# EAGLE board GabozePocaioPlus (EAGLE 9.0.0)
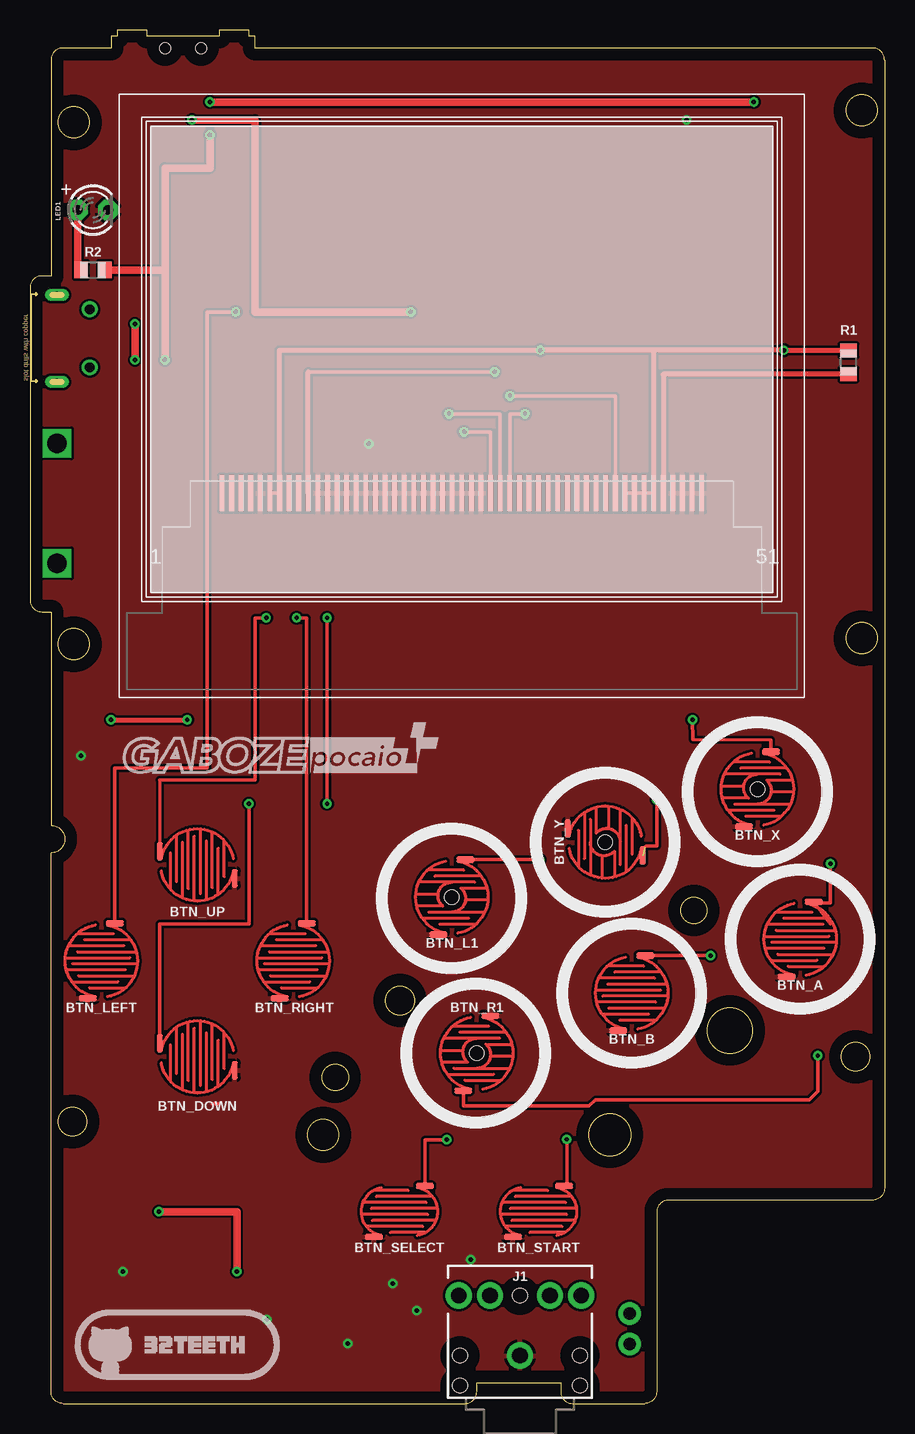
[diagram p0: board, top side]
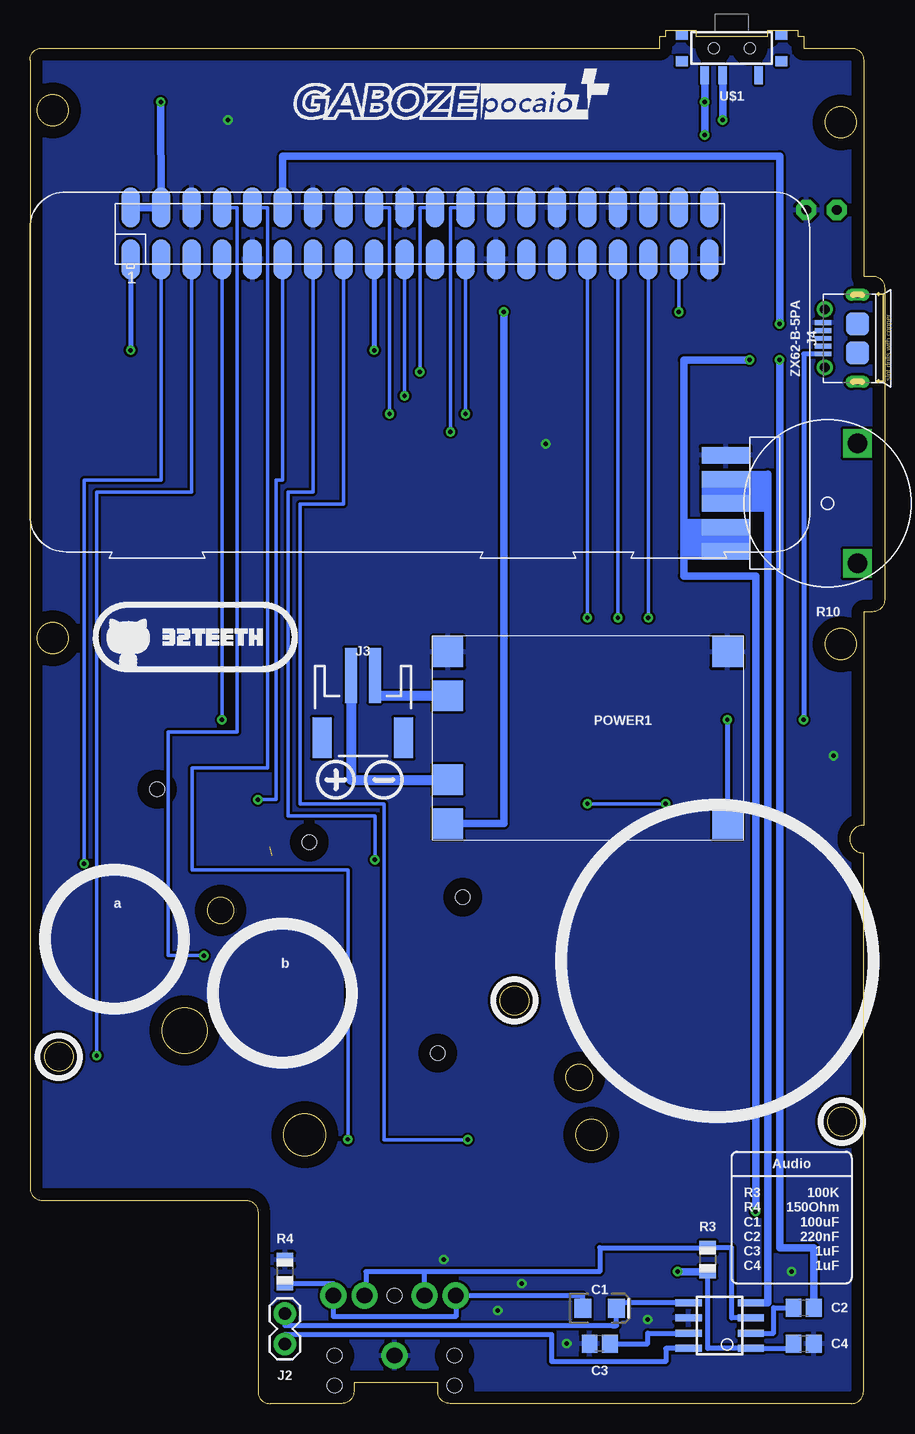
[diagram p1: board, bottom side, seen from below]

Size 71.25 x 114.5 mm. Coordinates in mm from the lower left corner, seen from the top.
Outline: 71.25,112 71.25,17.95 arc-90 70.25,16.95 53.25,16.95 arc90 52.25,15.95 52.25,1 arc-90 51.25,0 45.25,0 arc-90 44.25,1 44.25,1.75 37.25,1.75 37.25,1 arc-90 36.25,0 2.75,0 arc-90 1.75,1 1.75,45.9 arc180 1.75,48.2 1.75,66 1,66 arc-90 0,67 0,93 arc-90 1,94 1.75,94 1.75,112 arc-90 2.75,113 6.75,113 6.75,114 7.25,114 7.25,114.5 9.75,114.5 9.75,114 15.75,114 15.75,114.5 18.25,114.5 18.25,114 18.75,114 18.75,113 70.25,113 arc-90 71.25,112
Outline: circle at 3.55,23.5 radius 1.2
Outline: circle at 68.85,28.9 radius 1.2
Outline: circle at 58.35,31.1 radius 1.9
Outline: circle at 48.35,22.4 radius 1.75
Outline: circle at 30.85,33.6 radius 1.2
Outline: circle at 25.45,27.2 radius 1.1
Outline: circle at 24.45,22.4 radius 1.3
Outline: circle at 55.35,41.1 radius 1.1
Outline: circle at 69.35,107.8 radius 1.3
Outline: circle at 3.65,106.8 radius 1.3
Outline: circle at 69.35,63.8 radius 1.3
Outline: circle at 3.65,63.3 radius 1.3
Copper layers (1*16): Top 0.035mm / dielectric 1.5mm / Bottom 0.035mm
Design rules "default *": minimum track width 10mil, minimum drill 24mil, track to track 8mil, track to pad 8mil, pad to pad 8mil, via to via 8mil, smd to smd 8mil, copper to edge 40mil, drill to drill 8mil, minimum pad ring 10mil, minimum via ring 8mil, stop-mask expansion 5mil, vias tented up to drill 10mil, thermal gap 10mil

## Footprints (pad centres in the part's own frame; a part is rotated, then mirrored left to right if it is on the bottom)
CONDUCTIVE_BUTTON = smd 1.5 x 0.508: P$ACTIVE 1.125,3.125; P$GND -1.125,-3.125
CONDUCTIVE_BUTTON_DRILL = smd 1.5 x 0.508: P$ACTIVE 1.125,3.125; P$GND -1.125,-3.125 | hole 1.2: 0,0
CONDUCTIVE_BUTTON_STARTSELECT = smd 1.5 x 0.508: P$ACTIVE 2.125,2.125; P$GND -2.125,-2.125
EIA3216 = smd 1.4 x 1.6: + 1.4,0; - -1.4,0
C0805 = smd 1.3 x 1.5: 1 -0.85,0; 2 0.85,0
AUDIO-JACK-KIT = drill 1.3 pad 2.184: RING 5,5.1; RSH 5,2.5; SLEEVE 0,0; TIP 5,-5.1; TSH 5,-2.5 | hole 1.2: 0,5; -2.5,5; -2.5,-5; 0,-5; 5,0
1X02 = drill 1.016 pad 1.88: 1 0,0; 2 2.54,0
JST-2-SMD = smd 1 x 4.6: 1 -1,-3.7; 2 1,-3.7 | smd 1.6 x 3.4: NC1 -3.4,1.5; NC2 3.4,1.5
MICRO-USB5+6P-SMD-0.65-AB = smd 0.4 x 1.35: 1 -1.3,2.875; 2 -0.65,2.875; 3 0,2.875; 4 0.65,2.875; 5 1.3,2.875 | smd 1.9 x 1.9: P1 -1.2,0; P2 1.2,0 | drill 0.508 pad 1.016 long: P3 -3.625,0; P4 3.625,0 | drill 0.8: P5 -2.425,2.73; P6 2.425,2.73
LED3MM = drill 0.813 pad 1.676 octagon: A -1.27,0; K 1.27,0
RPI-ZERO = smd 1.524 x 3.302: 1 8.382,24.384; 2 8.382,28.702; 3 10.922,24.384; 4 10.922,28.702; 5 13.462,24.384; 6 13.462,28.702; 7 16.002,24.384; 8 16.002,28.702; 9 18.542,24.384; 10 18.542,28.702; 11 21.082,24.384; 12 21.082,28.702; 13 23.622,24.384; 14 23.622,28.702; 15 26.162,24.384; 16 26.162,28.702; 17 28.702,24.384; 18 28.702,28.702; 19 31.242,24.384; 20 31.242,28.702; 21 33.782,24.384; 22 33.782,28.702; 23 36.322,24.384; 24 36.322,28.702; 25 38.862,24.384; 26 38.862,28.702; 27 41.402,24.384; 28 41.402,28.702; 29 43.942,24.384; 30 43.942,28.702; 31 46.482,24.384; 32 46.482,28.702; 33 49.022,24.384; 34 49.022,28.702; 35 51.562,24.384; 36 51.562,28.702; 37 54.102,24.384; 38 54.102,28.702; 39 56.642,24.384; 40 56.642,28.702
03962A = smd 2.54 x 2.54: B+ 12,1.35; B- 5,1.35; IN+ 15.65,24.65; IN- 1.35,24.65; OUT+ 15.65,1.35; OUT- 1.35,1.35
R0805 = smd 1.1 x 1.4: 1 -1,0; 2 1,0
VOLUME = smd 1.4 x 4: 1 -4,-2; 2 -2,-2; 3 0,-2; 4 2,-2; 5 4,-2 | drill 1.6 square: P$6 -5,9; P$7 5,9
SOIC8 = smd 0.6 x 2.2: 1 -1.905,-2.6; 2 -0.635,-2.6; 3 0.635,-2.6; 4 1.905,-2.6; 5 1.905,2.6; 6 0.635,2.6; 7 -0.635,2.6; 8 -1.905,2.6
KPS-1290 = smd 0.7 x 1.5: O -2.25,2.25; P 0.75,2.25; S 2.25,2.25 | smd 1 x 0.8: P$1 -4.15,1.1; P$2 -4.15,-1.1; P$3 4.15,-1.1; P$4 4.15,1.1 | hole 0.9: -1.5,0; 1.5,0
TFT-DISPLAY-2.6-51PIN = smd 0.4 x 3: P$1 -20,-8.12; P$2 -19.2,-8.12; P$3 -18.4,-8.12; P$4 -17.6,-8.12; P$5 -16.8,-8.12; P$6 -16,-8.12; P$7 -15.2,-8.12; P$8 -14.4,-8.12; P$9 -13.6,-8.12; P$10 -12.8,-8.12; P$11 -12,-8.12; P$12 -11.2,-8.12; P$13 -10.4,-8.12; P$14 -9.6,-8.12; P$15 -8.8,-8.12; P$16 -8,-8.12; P$17 -7.2,-8.12; P$18 -6.4,-8.12; P$19 -5.6,-8.12; P$20 -4.8,-8.12; P$21 -4,-8.12; P$22 -3.2,-8.12; P$23 -2.4,-8.12; P$24 -1.6,-8.12; P$25 -0.8,-8.12; P$26 0,-8.12; P$27 0.8,-8.12; P$28 1.6,-8.12; P$29 2.4,-8.12; P$30 3.2,-8.12; P$31 4,-8.12; P$32 4.8,-8.12; P$33 5.6,-8.12; P$34 6.4,-8.12; P$35 7.2,-8.12; P$36 8,-8.12; P$37 8.8,-8.12; P$38 9.6,-8.12; P$39 10.4,-8.12; P$40 11.2,-8.12; P$41 12,-8.12; P$42 12.8,-8.12; P$43 13.6,-8.12; P$44 14.4,-8.12; P$45 15.2,-8.12; P$46 16,-8.12; P$47 16.8,-8.12; P$48 17.6,-8.12; P$49 18.4,-8.12; P$50 19.2,-8.12; P$51 20,-8.12

## Placement (x,y rotation side)
BTN_A  CONDUCTIVE_BUTTON  [CONDUCTIVE_BUTTON]  64.22,38.7 0 top
BTN_B  CONDUCTIVE_BUTTON  [CONDUCTIVE_BUTTON]  50.17,34.21 0 top
BTN_DOWN  CONDUCTIVE_BUTTON  [CONDUCTIVE_BUTTON]  13.95,28.9 90 top
BTN_L1  CONDUCTIVE_BUTTON_DRILL  [CONDUCTIVE_BUTTON_DRILL]  35.17,42.21 0 top
BTN_LEFT  CONDUCTIVE_BUTTON  [CONDUCTIVE_BUTTON]  5.95,36.9 0 top
BTN_R1  CONDUCTIVE_BUTTON_DRILL  [CONDUCTIVE_BUTTON_DRILL]  37.25,29.2 180 top
BTN_RIGHT  CONDUCTIVE_BUTTON  [CONDUCTIVE_BUTTON]  21.95,36.9 0 top
BTN_SELECT  CONDUCTIVE_BUTTON_STARTSELECT  [CONDUCTIVE_BUTTON_STARTSELECT]  30.8,16.01 0 top
BTN_START  CONDUCTIVE_BUTTON_STARTSELECT  [CONDUCTIVE_BUTTON_STARTSELECT]  42.41,16.01 0 top
BTN_UP  CONDUCTIVE_BUTTON  [CONDUCTIVE_BUTTON]  13.95,44.9 90 top
BTN_X  CONDUCTIVE_BUTTON_DRILL  [CONDUCTIVE_BUTTON_DRILL]  60.65,51.21 0 top
BTN_Y  CONDUCTIVE_BUTTON_DRILL  [CONDUCTIVE_BUTTON_DRILL]  47.96,46.8 270 top
C1  10uF  [EIA3216]  23.75,7.95 0 bottom
C2  220nF  [C0805]  6.75,8 0 bottom
C3  1uF  [C0805]  23.75,5 180 bottom
C4  1uF  [C0805]  6.75,5 0 bottom
J1  AUDIO_JACK_3.5MM_KIT  [AUDIO-JACK-KIT]  40.85,4 90 top
J2  SPKR  [1X02]  50,7.5 270 bottom
J3  Batt Conn  [JST-2-SMD]  43.5,57 180 bottom
J4  ZX62-B-5PA  [MICRO-USB5+6P-SMD-0.65-AB]  2.25,88.8 90 bottom
LED1  Red  [LED3MM]  5.25,99.5 0 top
PI1  RPI-ZERO  [RPI-ZERO]  71.25,71 0 bottom
POWER1  03962A  [03962A]  37.75,64 270 bottom
R1  3.9Ohms  [R0805]  68.25,86.8 90 top
R2  1.5K Ohms  [R0805]  5.25,94.5 0 top
R3  100K Ohm  [R0805]  14.75,12 270 bottom
R4  150 Ohm  [R0805]  50,11 270 bottom
R10  27k  [VOLUME]  11.25,75.05 270 bottom
U1  LM4875  [SOIC8]  13.75,6.5 90 bottom
U$1  SWITCH_SPDT  [KPS-1290]  12.75,113 180 bottom
U$2  TFT-DISPLAY-2.6-51PIN  [TFT-DISPLAY-2.6-51PIN]  36,84 0 top

## Library data of the parts
BTN_A BTN_B BTN_DOWN BTN_LEFT BTN_R1 BTN_RIGHT BTN_SELECT BTN_START BTN_UP BTN_X BTN_Y = 32teeth - Conductive Buttons
BTN_L1 = ConductiveButtons
C1 = SparkFun-Capacitors; PROD_ID: CAP-00811
C2-C4 LED1 R1-R4 = adafruit
J1 = SparkFun-Connectors; PROD_ID: CONN-08774; SF_ID: PRT-08032
J2 = SparkFun-Connectors
J3 = SparkFun-Connectors; BTM_NEG: -; BTM_POS: +; PROD_ID: CONN-11443; TOP_NEG: -; TOP_POS: +
J4 = Seeed-Connector; MPN: ZX62-B-5PA
PI1 = 32teeth - Gaboze-Pi
POWER1 = 03962A
R10 = GBA
U1 = texas
U$1 = SparkFun-Retired; PROD_ID: SWCH-10651
U$2 = 32teeth - 2.6" TFT 51P

## Nets
3V3: PI1.1 PI1.17 R1.2 U$2.P$6 U$2.P$7 U$2.P$43 U$2.P$44 U$2.P$45 U$2.P$46
A: BTN_A.P$ACTIVE PI1.3
B: BTN_B.P$ACTIVE PI1.8
BATT+: J3.2 POWER1.B+
BATT-: J3.1 POWER1.B-
BYP: C3.1 U1.7
CSX: PI1.24 U$2.P$29
D/CX: PI1.18 U$2.P$31
DC_VOL: R10.3 U1.4
DOWN: BTN_DOWN.P$ACTIVE PI1.31
GND: BTN_A.P$GND BTN_B.P$GND BTN_DOWN.P$GND BTN_L1.P$GND BTN_LEFT.P$GND BTN_R1.P$GND BTN_RIGHT.P$GND BTN_SELECT.P$GND BTN_START.P$GND BTN_UP.P$GND BTN_X.P$GND BTN_Y.P$GND C3.2 C4.2 J1.SLEEVE J4.5 LED1.K PI1.6 PI1.9 PI1.14 PI1.20 PI1.25 PI1.30 PI1.34 PI1.39 POWER1.IN- POWER1.OUT- R4.1 R10.1 U1.6 U$2.P$5 U$2.P$11 U$2.P$12 U$2.P$13 U$2.P$14 U$2.P$15 U$2.P$16 U$2.P$17 U$2.P$18 U$2.P$19 U$2.P$20 U$2.P$21 U$2.P$22 U$2.P$23 U$2.P$24 U$2.P$25 U$2.P$26 U$2.P$27 U$2.P$28 U$2.P$48 U$2.P$49 U$2.P$50 U$2.P$51
GPIO5: PI1.29
HEADPHONES: J1.RSH J1.TSH R3.1 U1.3
L1: BTN_L1.P$ACTIVE PI1.13
LED: LED1.A R2.1
LEFT: BTN_LEFT.P$ACTIVE PI1.37
N$1: R1.1 U$2.P$47
PWM: C2.2 PI1.12
R1: BTN_R1.P$ACTIVE PI1.5
RESET: PI1.22 U$2.P$10
RIGHT: BTN_RIGHT.P$ACTIVE PI1.33
SCL: PI1.23 U$2.P$30
SDI: PI1.19 U$2.P$42
SELECT: BTN_SELECT.P$ACTIVE PI1.15
START: BTN_START.P$ACTIVE PI1.10
SWITCH_IN+: POWER1.OUT+ U$1.P
SWITCH_OUT+: C4.1 PI1.2 PI1.4 R2.2 R3.2 R10.5 U1.1 U$1.S
UP: BTN_UP.P$ACTIVE PI1.35
VIN: C2.1 U1.2
VIN1: C1.- J1.RING J1.TIP R4.2
VOUT1: C1.+ J2.1 U1.5
VOUT2: J2.2 U1.8
VUSB: J4.1 POWER1.IN+
X: BTN_X.P$ACTIVE PI1.7
Y: BTN_Y.P$ACTIVE PI1.11

## Tracks (layer width: path | path; a pad name or v marks a point on that pad's centre or on a via)
3V3  (via drill 0.35)
  Top 0.305: U$2.P$7 U$2.P$6 | U$2.P$43 U$2.P$44 U$2.P$45 U$2.P$46
  Top 0.406: 52,87.8 v62.87,87.8 R1.2 | 52,87.8 v42.55,87.8 20.8,87.8 U$2.P$7 | U$2.P$46 52,87.8
  Bottom 0.406: PI1.1 v62.87,87.8 | PI1.17 v42.55,87.8
A  (via drill 0.35)
  Top 0.254: 66.75,39.95 65.41,41.74 BTN_A.P$ACTIVE
  Top 0.305: v66.75,45 66.75,41.74 65.41,41.74
  Bottom 0.305: PI1.3 60.33,77 66.75,77 v66.75,45
B  (via drill 0.35)
  Top 0.305: BTN_B.P$ACTIVE v56.75,37.34
  Bottom 0.305: PI1.8 53.98,99.7 53.98,56 59.75,56 59.75,37.34 v56.75,37.34
BATT+
  Bottom 0.813: J3.2 44.5,52 POWER1.B+
BATT-
  Bottom 0.813: POWER1.B- 42.5,59 J3.1
BYP
  Bottom 0.406: C3.1 19.75,5 19.75,5.87 U1.7
CSX  (via drill 0.35)
  Top 0.305: U$2.P$29 38.4,81 v36.2,81
  Bottom 0.305: PI1.24 36.2,99.7 v36.2,81
D/CX  (via drill 0.35)
  Top 0.305: U$2.P$31 40,82.5 v41.27,82.5
  Bottom 0.305: PI1.18 41.27,99.7 v41.27,82.5
DC_VOL
  Bottom 0.61: U1.4 9.75,8.4 9.75,75 | 9.75,75 9.75,77.5 | R10.3 9.8,75.05 9.75,75
DOWN  (via drill 0.35)
  Top 0.305: v24.78,65.5 v24.78,50 | v18.25,50 18.25,40 10.82,40 BTN_DOWN.P$ACTIVE
  Bottom 0.305: v18.25,50 v24.78,50 | PI1.31 v24.78,65.5
GND  (via drill 0.35)
  Top 0.305: 15.2,25 15.75,25
  other vias: 36.75,12 30.25,10 32.25,7.75 7.75,11 54.75,107 26.5,5 19.75,7 4.25,54 28.25,80
  pour Top: 1.75,0 37.25,0 37.25,1.75 44.25,1.75 44.25,0 52.25,0 52.25,16.95 71.25,16.95 71.25,113 18.75,113 18.75,114 18.25,114 18.25,114.5 15.75,114.5 15.75,114 9.75,114 9.75,114.5 7.25,114.5 7.25,114 6.75,114 6.75,113 1.75,113 1.75,94 0,94 0,66 1.75,66
  pour Bottom: 1.75,0 37.25,0 37.25,1.75 44.25,1.75 44.25,0 52.25,0 52.25,16.95 71.25,16.95 71.25,113 18.75,113 18.75,114 18.25,114 18.25,114.5 15.75,114.5 15.75,114 9.75,114 9.75,114.5 7.25,114.5 7.25,114 6.75,114 6.75,113 1.75,113 1.75,94 0,94 0,66 1.75,66
HEADPHONES
  Bottom 0.406: 38.35,11 23.75,11 23.75,13 R3.1 12.75,13 12.75,7.13 U1.3 | 38.35,11 43.25,11 43.25,9 J1.TSH | J1.RSH 38.35,11
L1  (via drill 0.35)
  Top 0.305: v42.5,45.34 BTN_L1.P$ACTIVE
  Bottom 0.305: PI1.13 47.63,76 49.75,76 49.75,49 42.5,49 v42.5,45.34
LED
  Top 0.61: LED1.A 3.98,94.5 R2.1
LEFT  (via drill 0.35)
  Top 0.305: v17.16,91 14.75,91 14.75,53 7.08,53 BTN_LEFT.P$ACTIVE
  Bottom 0.305: PI1.37 v17.16,91
N$1
  Top 0.406: R1.1 52.8,85.8 U$2.P$47
PWM  (via drill 0.35)
  Top 0.61: v8.75,90 v8.75,87
  Bottom 0.61: PI1.12 50.18,104 8.75,104 v8.75,90 | v8.75,87 8.75,13 5.9,13 C2.2
R1  (via drill 0.35)
  Top 0.305: v65.69,29 65.69,26.04 64.98,25.32 47.14,25.32 46.62,24.8 36.15,24.8 BTN_R1.P$ACTIVE
  Bottom 0.305: v65.69,29 65.69,76 57.79,76 PI1.5
RESET  (via drill 0.35)
  Top 0.305: 23.2,86 v38.75,86
  Top 0.406: U$2.P$10 23.2,86
  Bottom 0.305: PI1.22 38.75,99.7 v38.75,86
RIGHT  (via drill 0.35)
  Top 0.305: v22.24,65.5 23.07,65.5 BTN_RIGHT.P$ACTIVE
  Bottom 0.305: v22.24,65.5 PI1.33
SCL  (via drill 0.35)
  Top 0.305: U$2.P$30 39.2,82.5 v34.93,82.5
  Bottom 0.305: v34.93,82.5 PI1.23
SDI  (via drill 0.35)
  Top 0.305: U$2.P$42 48.8,84 v40.02,84
  Bottom 0.305: v40.02,84 PI1.19
SELECT  (via drill 0.35)
  Top 0.305: v34.75,22 32.93,22 BTN_SELECT.P$ACTIVE
  Bottom 0.305: v34.75,22 41.75,22 41.75,50 48.75,50 48.75,75 45.09,75 PI1.15
START  (via drill 0.35)
  Top 0.254: 44.75,18.14 BTN_START.P$ACTIVE
  Top 0.305: v44.75,22.01 44.75,18.14
  Bottom 0.305: PI1.10 51.44,99.7 51.44,53 57.75,53 57.75,44.5 44.75,44.5 v44.75,22.01
SWITCH_IN+  (via drill 0.35)
  Top 0.61: v13.5,107 18.75,107 18.75,91 v31.75,91
  Bottom 0.61: POWER1.OUT+ 31.75,48.35 v31.75,91 | U$1.P v13.5,107
SWITCH_OUT+  (via drill 0.35)
  Top 0.61: v15,108.5 v60.34,108.5 | v15,105.75 15,103 11.25,103 11.25,94.5 | v11.25,87 11.25,94.5 | v17.25,11 17.25,16 v10.75,16 | R2.2 11.25,94.5
  Bottom 0.254: 7.6,4.59 C4.1
  Bottom 0.406: R3.2 14.75,4.59 U1.1 7.6,4.59
  Bottom 0.61: PI1.2 PI1.4 v60.34,108.5 | v15,105.75 v15,108.5 U$1.S | R3.2 v17.25,11 | v11.25,87 16.75,87 16.75,71 | 16.75,71 16.75,69 10.75,69 v10.75,16 | R10.5 16.7,71.05 16.75,71
UP  (via drill 0.35)
  Top 0.254: 10.82,52 BTN_UP.P$ACTIVE
  Top 0.305: v19.7,65.5 18.75,65.5 18.75,52 10.82,52
  Bottom 0.305: PI1.35 v19.7,65.5
VIN
  Bottom 0.406: U1.2 9.25,5.87 9.25,8 C2.1
VIN1
  Bottom 0.406: R4.2 45.95,10 J1.TIP 45.95,7.25 35.75,7.25 J1.RING 25.15,9 C1.-
VOUT1
  Bottom 0.254: 22.9,8.4 C1.+ | 22.35,6.5 22.75,6.5
  Bottom 0.406: J2.1 50,6.5 22.75,6.5 22.35,6.5 C1.+ 22.35,8.4 U1.5
VOUT2
  Bottom 0.406: U1.8 18.25,4.59 18.25,3.5 27.75,3.5 27.75,5.75 50,5.75 J2.2
VUSB  (via drill 0.35)
  Top 0.406: v6.75,57 v13.1,57
  Bottom 0.406: J4.1 6.75,87.5 v6.75,57 | v13.1,57 POWER1.IN+
X  (via drill 0.35)
  Top 0.305: v55.25,57 55.26,55.34 61.75,55.3 BTN_X.P$ACTIVE
  Bottom 0.305: PI1.7 v55.25,57
Y  (via drill 0.35)  (1 unrouted)
  Top 0.305: v52.25,50.34 52.25,46.5 51.38,46.5 51.27,46.39
  Bottom 0.305: PI1.11 50.17,77 50.75,77 50.75,50.34 v52.25,50.34
(copper drawn outside any net)
  shapes: Bottom area x2

## Text on the board
bPlace: a | b | Audio | 100K / 150Ohm / 100uF / 220nF / 1uF / 1uF | R3 / R4 / C1 / C2 / C3 / C4 | R3 | R4 | C1 | C2 | C4 | C3
200bmp: 32teeth | 32teeth | 32teeth | 32teeth